# EAGLE board street light (EAGLE 6.5.0)
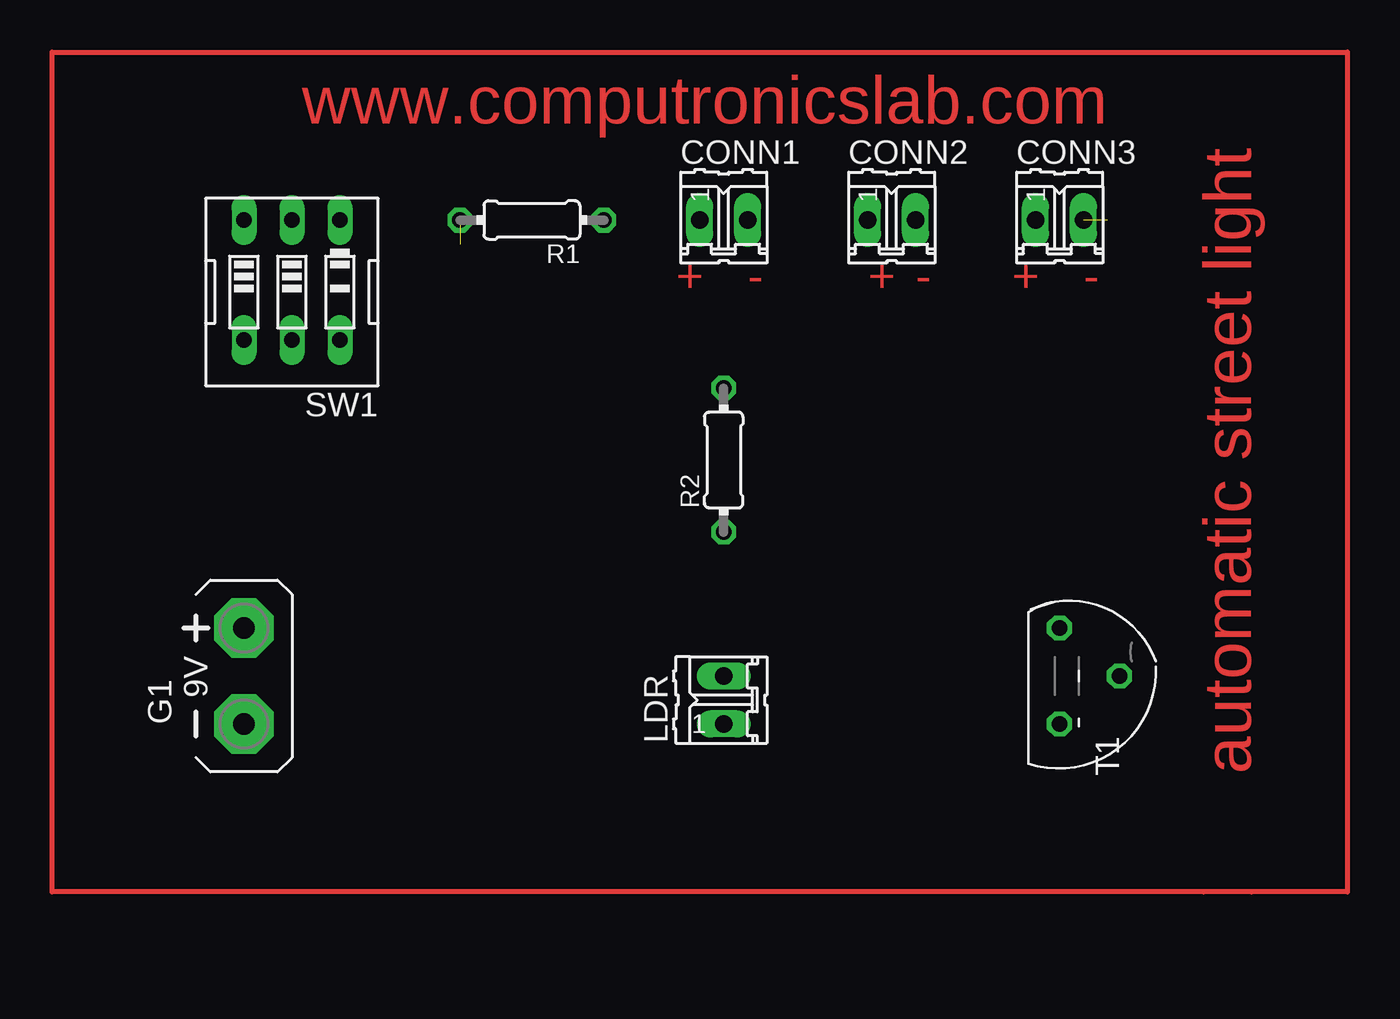
[diagram p0: board, top side]
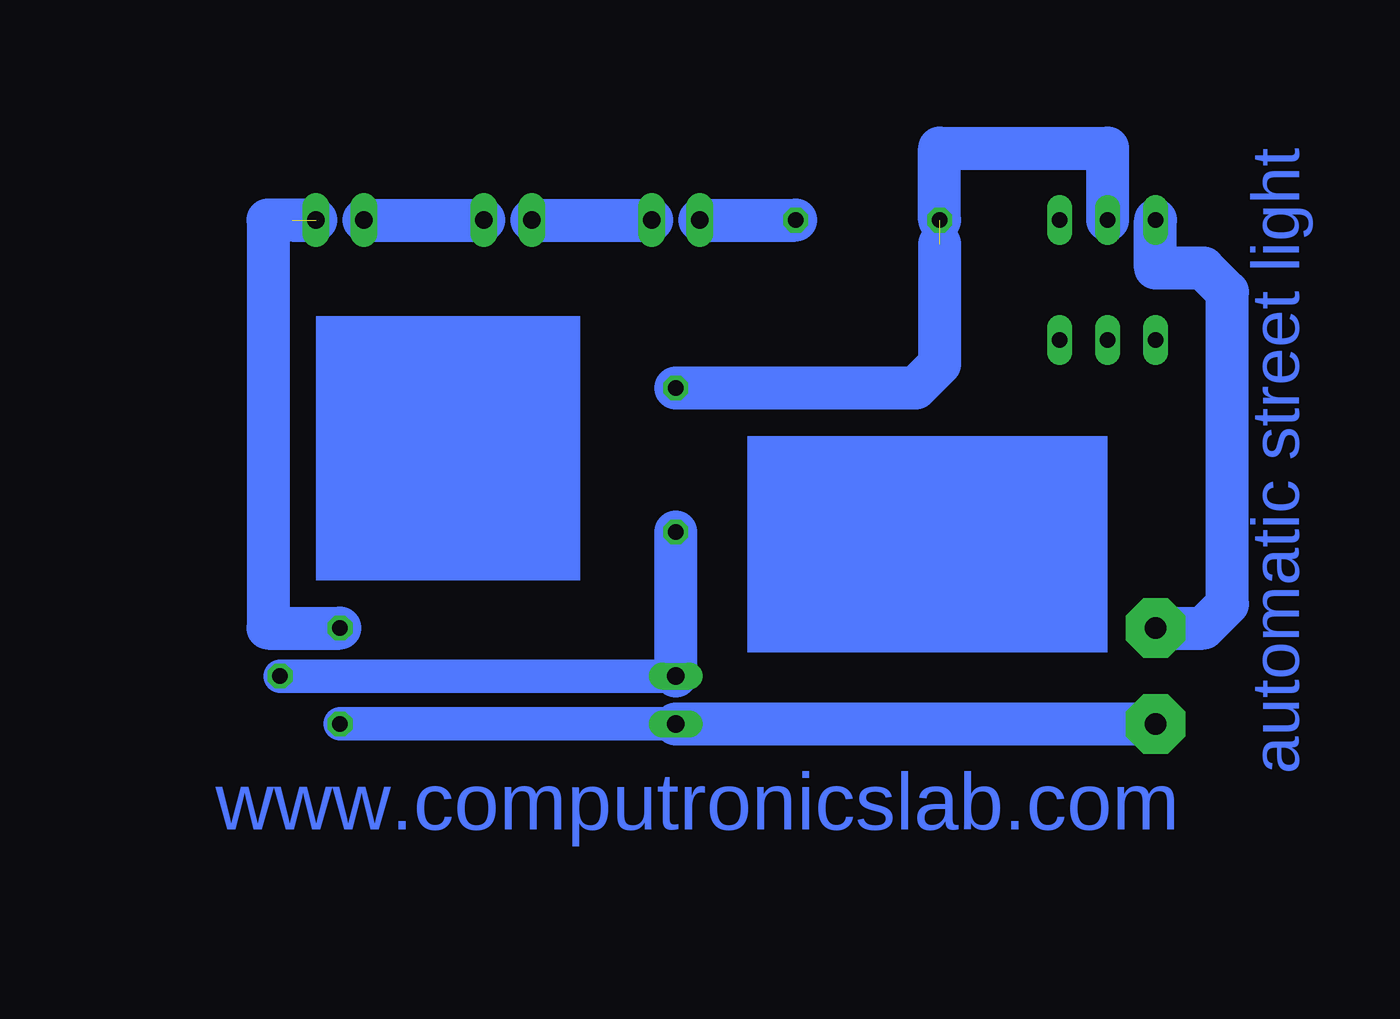
[diagram p1: board, bottom side, seen from below]

No outline drawn. Coordinates in mm, seen from the top.
Copper layers (1*16): Top 0.035mm / dielectric 1.5mm / Bottom 0.035mm
Design rules "default *": minimum track width 90mil, minimum drill 24mil, track to track 8mil, track to pad 8mil, pad to pad 8mil, via to via 8mil, smd to smd 8mil, copper to edge 40mil, drill to drill 8mil, minimum pad ring 10mil, minimum via ring 8mil, stop-mask expansion 4mil, vias tented up to drill 0mil, thermal gap 10mil

## Footprints (pad centres in the part's own frame; a part is rotated, then mirrored left to right if it is on the bottom)
02P = drill 0.914 long: 1 -1.27,0; 2 1.27,0
AB9V = drill 1.118 pad 3.15 octagon: + 0,2.54; - 0,-2.54
0204/7 = drill 0.813 octagon: 1 -3.81,0; 2 3.81,0
EDG-03 = drill 0.813 long: 1 -2.54,-3.81; 2 0,-3.81; 3 2.54,-3.81; 4 2.54,2.54; 5 0,2.54; 6 -2.54,2.54
TO92 = drill 0.813 octagon: 1 2.54,-1.27; 2 0,1.905; 3 -2.54,-1.27

## Placement (x,y rotation side)
CONN1  2 PIN  [02P]  34.29,59.69 0 top
CONN2  2 PIN  [02P]  43.18,59.69 0 top
CONN3  2 PIN  [02P]  52.07,59.69 0 top
G1  AB9V  [AB9V]  8.89,35.56 0 top
LDR  [02P]  34.29,34.29 90 top
R1  220E  [0204/7]  24.13,59.69 180 top
R2  100k  [0204/7]  34.29,46.99 90 top
SW1  [EDG-03]  11.43,55.88 180 top
T1  BC547  [TO92]  53.34,35.56 270 top

## Library data of the parts
CONN1-CONN3 LDR = con-amp-quick; OC_FARNELL: unknown; OC_NEWARK: unknown
G1 = battery
R1 R2 = eagle-ltspice; SPICEMODEL: NONE; SPICEPREFIX: R
SW1 = special
T1 = transistor

## Nets
N$1: CONN1.1 R1.1
N$2: CONN1.2 CONN2.1
N$3: CONN2.2 CONN3.1
N$4: CONN3.2 T1.3
N$5: G1.+ SW1.3
N$6: R1.2 R2.2 SW1.2
N$7: LDR.2 R2.1 T1.2
N$8: G1.- LDR.1 T1.1

## Tracks (layer width: path | path; a pad name or v marks a point on that pad's centre or on a via)
N$1
  Bottom 2.286: CONN1.1 R1.1
N$2
  Bottom 2.286: CONN2.1 CONN1.2
N$3
  Bottom 2.286: CONN3.1 CONN2.2
N$4  (1 unrouted)
  Bottom 2.286: 54.61,59.69 CONN3.2 55.88,59.69 55.88,38.1 T1.3
N$5
  Bottom 2.286: SW1.3 8.89,57.15 6.35,57.15 5.08,55.88 5.08,39.37 6.35,38.1 G1.+
N$6  (1 unrouted)
  Bottom 2.286: SW1.2 11.43,63.5 20.32,63.5 R1.2 | 20.32,58.42 20.32,52.07 21.59,50.8 R2.2
N$7
  Bottom 1.778: LDR.2 T1.2
  Bottom 2.286: LDR.2 R2.1
N$8
  Bottom 1.778: LDR.1 T1.1
  Bottom 2.286: LDR.1 G1.-
N$9
  Top 0.254: 62.23,24.13 -1.27,24.13 -1.27,67.31
N$10
  Top 0.254: 67.31,67.31 67.31,24.13 59.69,24.13
N$11
  Top 0.254: -1.27,67.31 -1.27,68.58 67.31,68.58 67.31,66.04
(copper drawn outside any net)
  shapes: Bottom area x2

## Text on the board
Top: www.computronicslab.com | automatic street light | + | - | + | - | + | -
Bottom: automatic street light | www.computronicslab.com